# Altium PCB DC721E V1.0.PcbDoc (part 2 of 2)
Units mm, origin at the board's own origin, x right, y up, seen from the top; angles counter-clockwise.
Board outline 110.72 x 218.65 mm, 2 copper layers (Top Layer, Bottom Layer); 126 components, 58 nets, 282 pads, 418 vias.
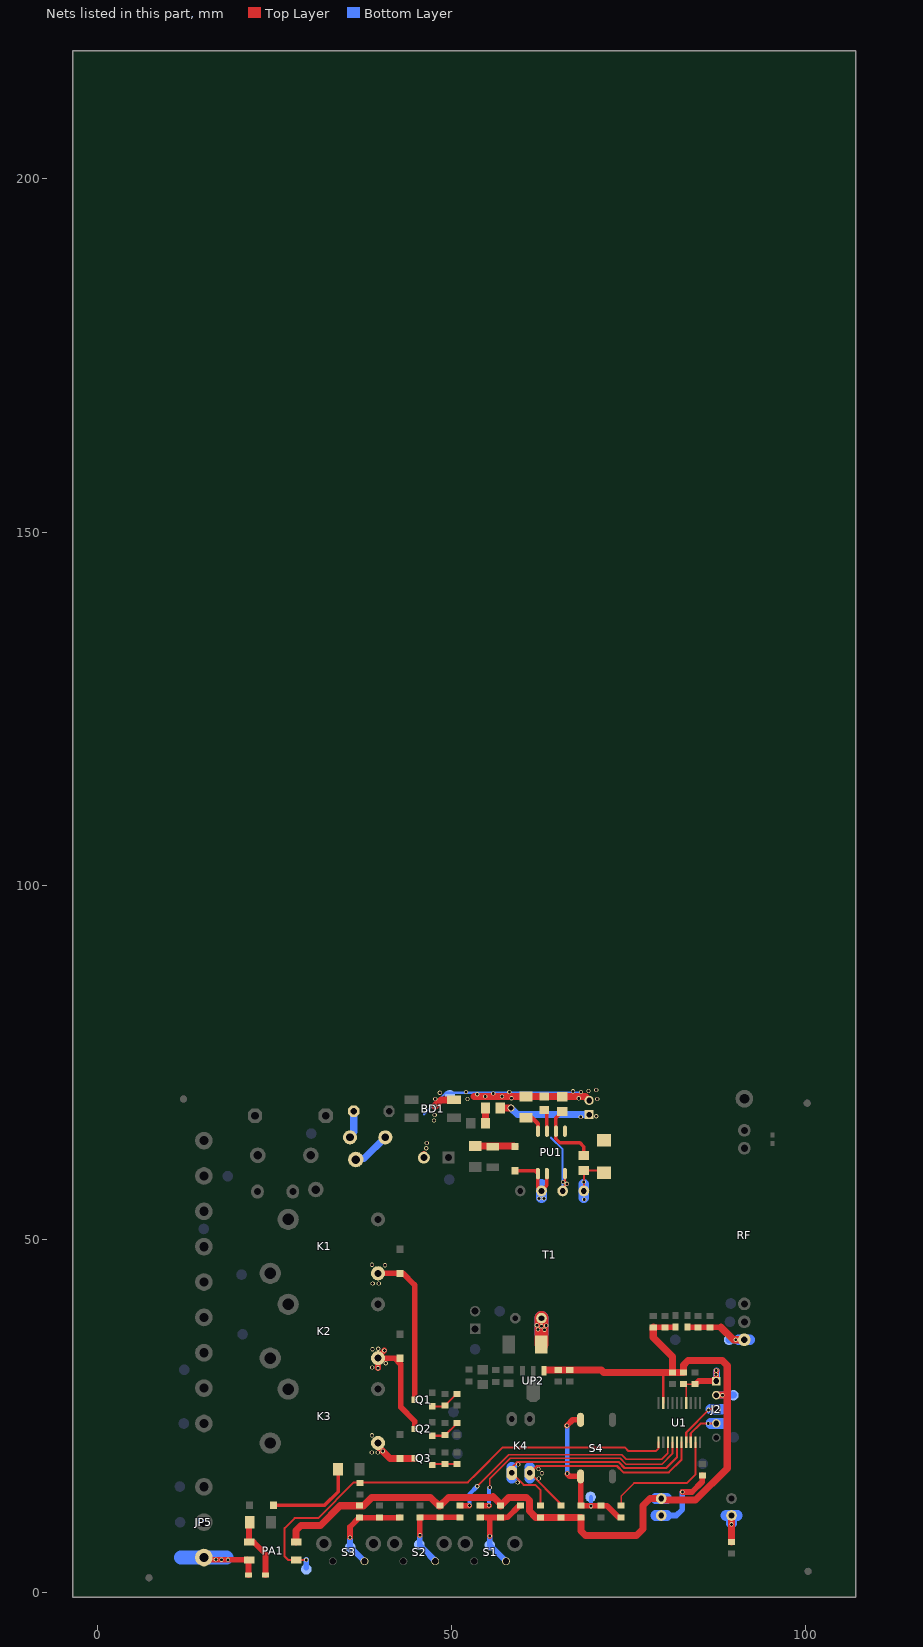
[diagram p2: the nets of this part, all layers, seen from the top]

## Via types
v1: diameter 0.6, hole 0.4, Top Layer to Bottom Layer, tented both sides, 417 vias
v2: diameter 1, hole 0.7, Top Layer to Bottom Layer, tented both sides, 1 vias

## Nets (pads, with @x,y where several pads share a name; then routed paths per layer and width w, separated by ;. In a path a pad name is that pad's centre, name@x,y a point inside that pad or via, vN(x,y) a via of type N, cw(c..) or ccw(c..) an arc to the next point about the centre after c; other vN are vias at no path point) (continued)
NetC10_1: C10.1 R2.2 R3.2 S1.3 UP.1 | length 16.1
  Top Layer w0.8: R3.2@54.077,10.675 R2.2@56.923,10.675 ; 54.938,10.618 55.423,10.618 ; v1(55.423,8.052) 55.423,10.618 ; 57.486,10.618 R2.2@56.923,10.618 ; C10.1@59.781,12.325 59.581,12.325 57.931,10.675 R2.2@56.923,10.675 ; 55.423,10.618 R2.2@56.923,10.618 ; R2.2@56.923,10.618 R2.2@56.923,10.675
  Bottom Layer w0.8: v1(55.423,8.052) UP.1@55.423,6.754 S1.3@57.71,4.467
NetC11_1: C11.1 R4.2 R5.2 S2.3 STOP.1 | length 13.9
  Top Layer w0.8: v1(45.542,8.153) 45.542,10.667 C11.1@45.55,10.675 R4.2@48.385,10.675 R5.2@51.231,10.675
  Bottom Layer w0.8: v1(45.542,8.153) 45.542,6.756 47.71,4.589 S2.3@47.71,4.467 46.939,5.238
NetC12_1: C12.1 DOWN.1 R6.2 R7.2 S3.3 | length 17.6
  Top Layer w0.8: v1(35.662,7.849) 35.662,9.337 R6.2@36.968,10.643 ; R6.2@37,10.675 R6.2@36.968,10.643 ; 37.923,10.618 39.662,10.618 R7.2@42.199,10.618 ; R7.2@42.692,10.675 42.66,10.643 39.858,10.643 R6.2@36.968,10.643
  Bottom Layer w0.8: v1(35.662,7.849) 35.662,6.516 S3.3@37.71,4.467
NetC13_1: C13.1 R8.2 R9.2 S4.2 S4.3 SET.1 | length 23.9
  Top Layer w0.254: v1(66.319,23.647) v1@66.319,23.927 ; v1@66.37,16.815 v1(66.37,16.891) ; S4.3@68.26,16.472 S4.3@68.26,17.031
  Top Layer w0.3: R9.2@73.653,10.675 R9.2@74,10.675
  Top Layer w0.8: v1(66.319,23.647) 67.144,24.472 S4.2@68.26,24.472 ; v1@66.37,16.815 66.713,16.472 S4.3@68.26,16.472 68.308,16.425 R8.2@68.308,12.325 C13.1@71.165,12.325 72.003,12.325 R9.2@73.653,10.675
  Bottom Layer w0.254: v1(66.319,23.647) v1@66.37,23.597 ; SET.1@69.672,13.564 SET.1@69.723,13.513
  Bottom Layer w0.6: v1(66.37,16.891) v1@66.37,23.597 ; v1(69.723,12.268) SET.1@69.723,13.513
NetCP2_2: CP2.2 DP2.2 RP3.1 | length 5.7
  Top Layer w1: RP3.1@53.365,63.197 58.874,63.197 DP2.2@58.979,63.092
NetCP3_1: CP3.1 DP1.2 PU1.1 RP2.1 | length 12.9
  Top Layer w1: RP2.1@56.905,68.555 v2(58.395,68.555)
  Bottom Layer w1: v2(58.395,68.555) 59.318,67.631 66.345,67.631 CP3.1@69.469,67.631
  other v1: 68.275,67.285 70.485,67.386
NetCP4_1: CP4.1 PU1.3 | length 3.2
  Top Layer w0.5: CP4.1@63.119,68.29 63.5,67.909 PU1.3@63.5,65.281
NetD1_1: D1.1 K1.4 Q1.1 | length 22.1
  Top Layer w0.8: K1.4@39.62,45.19 39.622,45.188 D1.1@42.748,45.188 43.153,45.188 44.8,43.541 Q1.1@44.8,27.33
  other v1: 38.862,43.764 39.726,43.764 40.589,46.33 38.76,46.406
NetD2_1: D2.1 K2.4 Q2.1 | length 16.9
  Top Layer w0.8: K2.4@39.144,33.19 K2.4@39.62,33.19 ; v1(39.624,31.775) 39.62,31.779 K2.4@39.62,33.19 ; v1(40.513,34.29) 39.62,33.397 K2.4@39.62,33.19 ; Q2.1@44.8,23.177 44.8,24.288 42.824,26.264 42.824,32.336 41.97,33.19 K2.4@39.62,33.19
  other v1: 38.811,31.877 40.716,32.461 38.837,34.442 39.649,34.519
NetD3_1: D3.1 K3.4 Q3.1 | length 6
  Top Layer w1: K3.4@39.144,21.19 41.308,19.026 41.986,19.026 44.29,19.026 ; Q3.1@44.798,19.026 Q3.1@44.8,19.025
  other v1: 38.735,19.863 39.573,19.863 40.293,20.041 38.76,22.276
NetD4_2: D4.2 PA1.1 R19.1 | length 8.1
  Top Layer w0.8: R19.1@21.375,9.32 21.375,7.279 PA1.1@21.44,7.214 22.028,7.214 23.704,5.537 D4.2@23.704,2.54
NetD5_1: D5.1 R12.2 | length 13.1
  Top Layer w0.5: D5.1@24.865,12.395 32.055,12.395 33.984,14.324 R12.2@33.984,17.475
NetDP1_1: DP1.1 RP4.2 T1.1 | length 7.8
  Top Layer w0.3: T1.1@68.73,56.837 68.732,56.839 RP4.2@68.732,59.732 71.242,59.732 DP1.1@71.577,59.397
  Bottom Layer w1.5: v1@68.73,55.888 68.73,57.788
  other v1: 68.783,55.626 68.707,58.09
NetDP2_1: DP2.1 PU1.5 PU1.6 T1.3 | length 10.7
  Top Layer w0.5: DP2.1@58.979,59.692 61.819,59.692 PU1.5@62.23,59.281 62.23,57.336 T1.3@62.73,56.837 63.5,57.607 PU1.6@63.5,59.281
  Bottom Layer w1.5: 62.73,55.888 62.73,57.788
  other v1: 62.382,55.753 63.068,55.753
NetDS1_1: DS1.1 T1.6 | length 5.9
  Top Layer w1: DS1.1@62.701,35.128 DS1.1@62.73,35.157
  Top Layer w2: DS1.1@62.73,35.157 T1.6@62.73,38.837
  Bottom Layer w2: 62.73,36.669 T1.6@62.73,38.837
  other v1: 63.17,37.211 62.255,37.236 62.73,37.694 63.398,37.821 62.078,37.846
NetLED1_2: LED1.2 R10.1 | length 11.7
  Top Layer w0.8: v1(82.652,14.275) 84.023,14.275 85.471,15.723 R10.1@85.471,16.599
  Bottom Layer w0.8: LED1.2@79.664,10.941 81.782,10.941 82.652,11.811 v1(82.652,14.275)
  Bottom Layer w1.5: 78.891,10.941 80.451,10.941
NetLED2_2: LED2.2 R11.1 | length 6.4
  Top Layer w0.3: LED2.2@89.586,10.927 LED2.2@89.6,10.941
  Top Layer w1: R11.1@89.586,7.2 LED2.2@89.586,10.927
  Bottom Layer w1.5: 88.827,10.941 LED2.2@89.6,10.941 ; v1@89.6,9.869 LED2.2@89.6,10.941 ; 90.387,10.941 LED2.2@89.6,10.941
  other v1: 89.6,9.692
NetLS1_1: LS1.1 RP8.2 | length 3.9
  Bottom Layer w1: RP8.2@35.651,64.414 35.651,64.643 36.184,65.176 LS1.1@36.184,68.097
NetNTC_2: NTC.2 RP8.1 | length 5.5
  Bottom Layer w0.3: NTC.2@36.483,61.277 NTC.2@36.625,61.419
  Bottom Layer w1: NTC.2@36.625,61.419 37.656,61.419 RP8.1@40.651,64.414
NetPU1_2: PU1.2 RP4.1 RP5.2 | length 9.9
  Top Layer w0.5: RP5.2@65.684,68.063 64.77,67.149 PU1.2@64.77,65.281 64.77,64.211 65.329,63.652 68.174,63.652 68.732,63.094 RP4.1@68.732,61.832
NetPU1_4: PU1.4 RP6.2 | length 3.1
  Top Layer w0.6: RP6.2@60.528,67.182 61.393,67.182 62.23,66.345 PU1.4@62.23,65.281
NetQ1_3: Q1.3 R13.1 R14.1 | length 4.2
  Top Layer w0.3: Q1.3@47.3,26.38 48.973,26.38 50.748,28.155 R13.1@50.8,28.155
NetQ2_3: Q2.3 R15.1 R16.1 | length 4.2
  Top Layer w0.3: Q2.3@47.3,22.227 49.025,22.227 R15.1@50.8,24.002
NetQ3_3: Q3.3 R17.1 R18.1 | length 3.6
  Top Layer w0.3: Q3.3@47.3,18.075 47.425,18.2 R18.1@49.098,18.2 R17.1@50.8,18.2
NetRP1_1: RP1.1 RP2.2 | length 2.2
  Top Layer w0.5: RP2.2@54.805,68.555 RP2.2@54.822,68.537
  Top Layer w1: RP1.1@54.822,66.396 RP2.2@54.822,68.537
NRST: C1.1 J2.1 R1.2 U1.4 | length 10.5
  Top Layer w0.254: U1.4@83.195,26.854 83.195,29.126 R1.2@82.818,29.503 C1.1@84.43,29.503
  Top Layer w0.8: C1.1@84.43,29.503 84.507,29.503 84.963,29.959 J2.1@87.452,29.959 87.452,31.369 v1@87.478,31.394
  Bottom Layer w1: J2.1@87.452,29.959 v1@87.452,31.344
  other v1: 87.427,30.886 87.452,31.445
PGND: BD1.2 CP1.2 CP3.2 CP4.2 PGND.1 PU1.8 RP5.1 RP6.1 T1.2 | length 55.9
  Top Layer w0.3: T1.2@65.73,56.837 66.04,57.147 PU1.8@66.04,59.281
  Top Layer w1: CP1.2@46.104,61.544 CP1.2@46.104,62.004 ; v1(47.65,68.809) 48.545,69.703 BD1.2@50.371,69.703 ; 53.203,70.182 RP6.1@60.528,70.182 68.918,70.182 CP3.2@69.469,69.631
  Bottom Layer w0.3: 46.104,67.643 49.174,70.714 68.386,70.714 CP3.2@69.469,69.631 ; 64.059,64.389 65.73,62.718 T1.2@65.73,56.837
  other v1: 66.319,57.836 65.761,58.09 46.431,62.865 46.507,63.602 47.523,66.802 47.625,67.589 70.612,69.825 47.701,69.85 52.273,69.85 67.996,69.926 58.496,69.952 54.788,70.182 57.15,70.182 53.645,70.51 55.905,70.612 48.362,70.714 52.07,70.841 58.191,70.841 68.326,70.841 67.183,70.917 69.367,70.968 70.485,71.095
S1: K4.1 R21.2 U1.15 | length 35.3
  Top Layer w0.3: K4.1@58.522,16.967 60.208,15.28 61.868,15.28 62.615,14.533 R21.2@62.615,12.325 ; 58.801,17.983 59.319,18.501 73.633,18.501 74.48,17.653 80.391,17.653 81.895,19.157 U1.15@81.895,21.304
  Bottom Layer w1.5: K4.1@58.522,16.194 K4.1@58.522,17.755
  other v1: 59.36,15.621 59.436,18.161
S2: K4.2 R22.1 U1.16 | length 33.5
  Top Layer w0.3: R22.1@65.462,12.325 65.462,12.567 K4.2@61.062,16.967 62.041,17.947 73.403,17.947 74.307,17.043 80.721,17.043 82.545,18.867 U1.16@82.545,21.304
  Bottom Layer w1.5: K4.2@61.062,16.194 K4.2@61.062,17.755
  other v1: 62.357,16.18 62.789,16.916 62.306,17.526
SET: R9.1 U1.19 | length 20.7
  Top Layer w0.254: R9.1@74,12.325 74,13.7 75.819,15.519 80.112,15.519 ; 83.109,15.519 80.112,15.519 ; U1.19@84.495,21.304 84.495,16.728 83.287,15.519 80.112,15.519
SING: D4.1 JP5.1 PA1.2 Sing.1 | length 15.5
  Top Layer w0.3: JP5.1@15,5 JP5.1@15.392,5 ; PA1.2@21.113,5 PA1.2@21.304,4.809
  Top Layer w0.8: JP5.1@15.392,5 15.719,4.674 PA1.2@21.44,4.674 21.304,4.538 D4.1@21.304,2.54
  Bottom Layer w2: Sing.1@11.764,5 JP5.1@15,5 18.216,5
  other v1: 18.39,4.674 17.501,4.699 16.688,4.724
SING-IO: PA1.3 R20.1 Sing-IO.1 U1.11 | length 67.8
  Top Layer w0.3: v1(29.464,4.674) PA1.3@28.04,4.674 26.899,4.674 26.416,5.156 26.416,9.144 27.838,10.566 31.151,10.566 36.205,15.621 52.299,15.621 53.619,16.942 ; 54,17.323 53.619,16.942 ; U1.11@79.295,21.304 79.295,20.443 78.892,20.041 75.032,20.041 74.493,20.579 57.256,20.579 53.619,16.942
  Bottom Layer w0.8: Sing-IO.1@29.464,3.556 v1(29.464,4.674)
STOP: R5.1 U1.13 | length 35.5
  Top Layer w0.254: v1@52.533,12.325 v1(52.553,12.344) ; v1(53.653,15.078) 58.115,19.54 74.063,19.54 74.698,18.905 79.756,18.905 80.595,19.744 U1.13@80.595,21.304
  Top Layer w0.8: R5.1@51.231,12.325 v1@52.533,12.325
  Bottom Layer w0.254: v1@53.653,15.02 v1(53.653,15.078)
  Bottom Layer w0.6: v1(52.553,12.344) 52.553,13.977 v1(53.653,15.078)
SWCLK: J2.4 U1.18 | length 7
  Top Layer w0.3: U1.18@83.845,21.304 83.845,22.555 85.249,23.959 J2.4@87.452,23.959
  Bottom Layer w1.5: 86.665,23.959 88.225,23.959
  other v1: 86.309,23.952
SWDIO: J2.3 U1.17 | length 8.6
  Top Layer w0.3: U1.17@83.195,21.304 83.195,22.688 86.466,25.959 J2.3@87.452,25.959
  Bottom Layer w1.5: 86.665,25.959 88.225,25.959
  other v1: 86.36,25.883
UP: R3.1 U1.14 | length 34.7
  Top Layer w0.254: v1@55.302,12.325 v1(55.321,12.344) ; v1(55.423,14.91) 55.423,16.129 58.326,19.032 73.853,19.032 74.687,18.197 79.767,18.197 81.245,19.675 U1.14@81.245,21.304
  Top Layer w0.8: R3.1@54.077,12.325 v1@55.302,12.325
  Bottom Layer w0.6: v1(55.321,12.344) 55.321,14.808 v1(55.423,14.91)
VCC: C2.2 CF9.1 CF10.1 CP7.1 CP8.1 J2.2 LED1.1 PA1.4 R1.1 R2.1 R4.1 R6.1 R8.1 R21.1 R22.2 RB3.1 U1.9 UP2.3 VCC.1 | length 144.6
  Top Layer w0.3: UP2.3@63.07,31.416 63.162,31.508 63.525,31.508 ; 79.945,29.947 U1.9@79.945,26.854 79.945,30.91 80.188,31.153
  Top Layer w0.8: CF10.1@78.574,37.567 RB3.1@81.382,37.567
  Top Layer w1: PA1.4@28.04,7.214 28.04,8.839 28.751,9.55 31.471,9.55 34.245,12.325 R6.1@37,12.325 37.555,12.325 38.734,13.504 47.058,13.504 48.237,12.325 R4.1@48.385,12.325 49.564,13.504 55.77,13.504 55.88,13.614 56.923,12.571 R2.1@56.923,12.325 58.102,13.504 60.613,13.504 61.036,13.081 61.036,11.557 61.918,10.675 R21.1@62.615,10.675 R22.2@65.462,10.675 R8.1@68.308,10.675 68.308,8.739 68.944,8.103 76.175,8.103 77.089,9.017 77.089,12.37 78.06,13.341 LED1.1@79.664,13.341 79.781,13.341 80.002,13.121 84.52,13.121 89.002,17.602 89.002,24.917 ; 63.525,31.508 CP8.1@65.1,31.508 CP7.1@66.726,31.508 71.183,31.508 71.539,31.153 80.188,31.153 C2.2@81.229,31.153 ; CF10.1@78.574,37.567 CF10.1@78.537,37.529 78.537,36.119 81.229,33.426 C2.2@81.229,31.153 ; 82.818,32.119 R1.1@82.818,31.153 ; J2.2@87.452,27.959 88.957,27.959 89.002,27.915 ; 89.002,24.003 89.002,24.917 ; C2.2@81.229,31.153 R1.1@82.818,31.153 ; R1.1@82.818,31.153 82.818,32.196 83.464,32.842 88.29,32.842 89.002,32.131 89.002,27.915 ; 89.002,24.917 89.002,27.915
  Bottom Layer w0.3: VCC.1@89.846,27.959 VCC.1@89.865,27.94
  Bottom Layer w1: J2.2@87.452,27.959 VCC.1@89.846,27.959
  Bottom Layer w1.5: 78.891,13.341 80.451,13.341
  other v1: 88.316,27.94
VCC_ANT: CF7.1 CF8.1 RB3.2 RF.1 VCC_ANT.1 | length 12.2
  Top Layer w0.8: RB3.2@83.693,37.567 88.087,37.567
  Top Layer w1: 88.087,37.567 89.865,35.789 RF.1@91.415,35.789
  Bottom Layer w1: VCC_ANT.1@89.256,35.789 RF.1@91.415,35.789
  Bottom Layer w1.5: RF.1@90.627,35.789 RF.1@92.188,35.789
  other v1: 90.195,35.789
pads on no net: MAKE1. MAKE2. MAKE3. MAKE4. U1.3 U1.8 U1.10
copper on no net:
  other v1: 0,0

## Polygon pours and split planes (outlines as drawn)
GND on Top Layer "BottomLayer-No Net" (solid, remove dead copper, pour order 1040): 103.835,42.342 103.784,42.291 74.524,42.291 73.787,42.291 72.822,41.326 72.492,40.996 72.492,37.16 72.492,34.036 71.526,33.071 70.51,32.055 62.84,32.055 43.84,32.055 42.672,30.886 41.3,29.515 41.3,20.142 33.35,12.192 32.563,11.405 13.995,11.405 11.43,11.405 10.744,10.719 9.855,9.83 9.855,0.025 102.514,0.025 103.886,1.397
S1 on Top Layer "BottomLayer-No Net" (solid, remove dead copper, pour order 1038): 61.29,18.644 58.877,18.644 58.471,18.644 58.014,18.186 57.734,17.907 57.734,17.221 57.734,15.824 57.963,15.596 58.42,15.138 61.214,15.138 60.63,15.138 60.147,15.621 59.842,15.926 59.842,17.526 59.842,17.805 60.401,18.364 60.477,18.44 61.366,18.44
S2 on Top Layer "BottomLayer-No Net" (solid, remove dead copper, pour order 1036): 63.068,18.11 60.731,18.11 60.579,18.11 60.477,18.009 60.3,17.831 60.3,17.17 60.3,16.129 60.528,15.9 61.493,15.9 61.925,15.9 62.281,15.545 64.795,13.03 64.795,11.989 64.795,11.963 64.872,11.887 65.126,11.887 65.938,11.887 65.964,11.913 65.964,12.268 65.964,12.751 65.634,13.081 63.449,15.265 63.449,17.272 63.449,17.628 63.729,17.907
12V/250MA on Top Layer "BottomLayer-No Net" (solid, remove dead copper, pour order 1034): 43.231,22.123 43.231,22.758 43.231,23.114 42.621,23.724 41.707,24.638 41.707,30.074 41.707,30.658 41.453,30.912 41.402,30.963 40.716,30.963 40.183,30.963 38.76,29.54 38.684,29.464 38.684,25.425 38.684,24.809 37.464,23.588 37.497,23.622 40.183,23.622 40.234,23.622 41.859,21.996 42.037,21.819 43.053,21.819 43.18,21.819 43.231,21.869
12V/250MA on Top Layer "BottomLayer-No Net" (solid, remove dead copper, pour order 1032): 43.256,36.093 43.256,37.922 43.256,41.275 42.469,42.062 39.37,42.062 39.065,42.062 38.608,41.605 38.481,41.478 38.481,40.945 38.481,39.827 42.215,36.093
12V/250MA on Top Layer "BottomLayer-No Net" (solid, remove dead copper, pour order 1030): 39.167,53.873 40.183,53.873 40.538,53.873 42.266,52.146 43.256,51.156 43.256,48.133 42.469,48.133 38.583,52.019 38.583,53.264 38.583,53.289 39.167,53.873
NetD3_1 on Top Layer "BottomLayer-No Net" (solid, remove dead copper, pour order 1028): 45.263,19.558 43.129,19.558 40.234,22.454 40.005,22.682 38.811,22.682 38.583,22.682 38.405,22.504 38.379,22.479 38.379,21.869 38.379,19.533 38.633,19.279 39.421,18.491 44.831,18.491 45.263,18.491 45.339,18.567 45.339,18.923 45.339,19.482 45.263,19.558
NetD2_1 on Top Layer "BottomLayer-No Net" (solid, remove dead copper, pour order 1026): 43.231,26.797 43.231,28.905 43.231,34.061 42.748,34.544 42.393,34.9 39.091,34.9 38.557,34.9 38.405,34.747 38.405,33.426 38.405,31.623 38.633,31.394 38.735,31.293 39.37,31.293 42.088,31.293 42.393,30.988 42.418,30.963 42.418,30.353 42.418,27.102 42.824,26.695
NetD1_1 on Top Layer "BottomLayer-No Net" (solid, remove dead copper, pour order 1025): 38.456,46.812 42.139,46.812 44.196,44.755 45.212,43.739 45.212,41.554 45.187,41.554 43.434,43.307 39.091,43.307 38.659,43.307 38.456,43.51 38.43,43.536 38.43,44.196 38.43,46.787 38.456,46.812
NetPU1_4 on Top Layer "BottomLayer-No Net" (solid, remove dead copper, pour order 1023): 61.925,64.745 61.925,65.608 61.925,65.989 61.62,66.294 61.443,66.472 60.96,66.472 59.665,66.472 59.639,66.497 59.639,67.386 59.639,67.64 59.868,67.869 59.893,67.894 60.884,67.894 61.417,67.894 61.671,67.64 62.535,66.777 62.535,64.897
NetCP3_1 on Top Layer "BottomLayer-No Net" (solid, remove dead copper, pour order 1021): 70.51,63.475 70.485,63.5 70.485,66.615 70.095,67.005 68.732,67.005 66.523,64.795 66.192,64.465 65.913,64.465 65.71,64.668 65.71,64.795 65.71,65.964 65.888,66.142 65.913,66.167 66.7,66.167 68.809,68.275 69.926,68.275 70.129,68.275 70.968,67.437 72.593,65.811 72.593,64.084 72.593,63.119 72.542,63.068 70.637,63.068 70.485,63.221
Net310V_1 on Top Layer "BottomLayer-No Net" (solid, remove dead copper, pour order 1020): 53.365,67.132 52.68,67.818 50.876,67.818 49.378,67.818 49.352,67.793 49.352,67.742 49.352,66.624 49.606,66.37 49.86,66.116 49.86,65.202 49.86,63.475 48.743,62.357 48.616,62.23 48.616,60.681 48.616,60.655 49.174,60.096 49.809,59.461 52.807,59.461 54.534,59.461 57.81,56.185 58.496,55.499 59.614,55.499 60.249,55.499 60.35,55.601 60.452,55.702 60.452,57.734 60.452,57.963 60.249,58.166 60.223,58.191 59.207,58.191 57.785,58.191 56.845,59.131 56.718,59.258 56.718,59.944 56.718,60.808 56.566,60.96 53.492,60.96 51.46,60.96 51.029,61.392 50.851,61.57 50.851,63.856 50.851,65.126 51.079,65.354 51.384,65.659 53.365,65.659
NetDP2_1 on Top Layer "BottomLayer-No Net" (solid, remove dead copper, pour order 1022): 58.496,60.3 62.23,60.3 62.382,60.147 62.535,59.995 62.535,57.887 62.535,57.785 62.636,57.683 62.713,57.607 62.89,57.607 62.992,57.607 63.144,57.76 63.195,57.81 63.195,58.776 63.195,60.071 63.297,60.173 63.322,60.198 63.551,60.198 63.652,60.198 63.779,60.071 63.805,60.046 63.805,59.461 63.805,57.556 63.551,57.302 63.475,57.226 63.475,56.515 63.475,55.575 63.297,55.397 63.195,55.296 62.433,55.296 62.306,55.296 62.001,55.601 61.951,55.651 61.951,57.81 61.951,58.674 61.646,58.979 61.443,59.182 59.08,59.182 58.445,59.182 58.395,59.233 58.344,59.284 58.344,59.538 58.344,60.147 58.496,60.3
NetDP1_1 on Top Layer "BottomLayer-No Net" (solid, remove dead copper, pour order 1024): 72.593,60.401 68.047,60.401 67.996,60.401 67.894,60.3 67.894,59.411 67.894,55.677 68.072,55.499 68.402,55.169 69.291,55.169 71.933,55.169 72.568,55.804 72.669,55.905 72.669,59.36 72.669,60.325 72.593,60.401
ACN on Top Layer "BottomLayer-No Net" (solid, remove dead copper, pour order 1027): 45.364,69.088 43.409,69.088 43.358,69.088 43.104,69.342 42.037,70.409 39.776,70.409 25.222,70.409 24.257,69.444 23.647,68.834 23.647,67.742 23.647,66.878 23.292,66.523 23.012,66.243 22.403,66.243 21.666,66.243 21.336,66.573 21.031,66.878 21.031,67.488 21.031,70.155 21.463,70.587 22.301,71.425 31.979,71.425 45.187,71.425 45.288,71.323 45.364,71.247 45.364,70.409
NetBD1_3 on Top Layer "BottomLayer-No Net" (solid, remove dead copper, pour order 1029): 45.339,67.793 43.358,67.793 42.697,67.793 41.732,68.758 41.605,68.885 40.437,68.885 40.132,68.58 40.056,68.504 40.056,68.123 40.056,67.97 41.097,66.929 41.427,66.599 45.364,66.599
PGND on Top Layer "BottomLayer-No Net" (solid, remove dead copper, pour order 1031): 66.624,60.096 66.624,56.21 66.396,55.982 66.37,55.956 65.659,55.956 65.38,55.956 65.176,56.159 64.973,56.363 64.973,56.845 64.973,57.175 65.354,57.556 65.456,57.658 65.456,59.284 65.456,60.046 65.608,60.198 65.684,60.274 66.218,60.274 66.446,60.274 66.624,60.096
PGND on Top Layer "BottomLayer-No Net" (solid, remove dead copper, pour order 1033): 71.247,71.247 71.247,69.621 71.247,69.367 70.968,69.088 70.866,68.986 69.088,68.986 68.351,68.986 67.97,69.367 67.843,69.494 59.766,69.494 59.538,69.494 59.385,69.647 59.36,69.672 58.547,69.672 53.442,69.672 52.984,69.215 52.883,69.113 50.343,69.113 48.768,69.113 48.209,68.555 48.133,68.478 48.133,67.64 48.133,65.176 47.65,64.694 46.965,64.008 46.965,61.417 46.965,60.833 46.66,60.528 46.457,60.325 45.644,60.325 45.212,60.325 45.06,60.477 44.983,60.554 44.983,62.027 44.983,63.754 46.126,64.897 47.142,65.913 47.142,67.996 47.142,70.637 47.625,71.12 47.955,71.45 51.13,71.45 71.044,71.45 71.247,71.247
GND on Bottom Layer "BottomLayer-No Net" (solid, remove dead copper, pour order 1054): 86.512,42.393 44.399,42.393 43.561,41.554 43.231,41.224 43.231,37.313 43.231,29.159 38.786,24.714 38.303,24.232 38.303,19.279 38.303,18.898 32.918,13.513 30.912,11.506 13.03,11.506 11.227,11.506 10.541,10.82 10.414,10.693 10.058,10.338 10.058,0.051 102.591,0.051 103.861,1.321 103.962,1.422 103.962,16.891 103.962,40.538 103.657,40.843 102.108,42.393 86.716,42.393
S1 on Bottom Layer "BottomLayer-No Net" (solid, remove dead copper, pour order 1052): 57.785,16.789 57.785,18.11 58.115,18.44 58.293,18.618 59.182,18.618 59.639,18.618 59.766,18.491 59.893,18.364 59.893,17.729 59.893,15.392 59.715,15.215 59.639,15.138 58.953,15.138 58.42,15.138 58.039,15.519 57.785,15.773 57.785,16.358
S2 on Bottom Layer "BottomLayer-No Net" (solid, remove dead copper, pour order 1050): 61.011,18.517 62.357,18.517 62.967,18.517 63.195,18.288 63.348,18.136 63.348,17.602 63.348,16.205 63.144,16.002 62.586,15.443 60.935,15.443 60.731,15.443 60.477,15.697 60.325,15.85 60.325,16.434 60.325,18.186 60.655,18.517
NetD3_1 on Bottom Layer "BottomLayer-No Net" (solid, remove dead copper, pour order 1048): 38.71,23.752 40.31,23.752 40.691,23.752 40.97,23.473 41.123,23.32 41.123,22.101 41.123,20.348 40.767,19.993 40.056,19.282 38.71,19.282 38.633,19.282 38.379,19.536 38.379,20.094 38.379,23.422 38.71,23.752
NetD2_1 on Bottom Layer "BottomLayer-No Net" (solid, remove dead copper, pour order 1046): 38.71,35.752 40.31,35.752 40.691,35.752 40.97,35.473 41.123,35.32 41.123,34.101 41.123,32.348 40.767,31.993 40.056,31.282 38.71,31.282 38.633,31.282 38.379,31.536 38.379,32.094 38.379,35.422 38.71,35.752
NetD1_1 on Bottom Layer "BottomLayer-No Net" (solid, remove dead copper, pour order 1044): 38.71,47.752 40.31,47.752 40.691,47.752 40.97,47.473 41.123,47.32 41.123,46.101 41.123,44.348 40.767,43.993 40.056,43.282 38.71,43.282 38.633,43.282 38.379,43.536 38.379,44.094 38.379,47.422 38.71,47.752
12V/250MA on Bottom Layer "BottomLayer-No Net" (solid, remove dead copper, pour order 1042): 38.583,53.365 38.583,51.892 41.046,49.428 41.478,48.997 41.478,44.348 38.684,41.554 38.583,41.453 38.583,40.335 38.583,40.132 40.64,38.075 41.453,37.262 41.453,33.579 41.453,32.283 38.659,29.489 38.608,29.439 38.608,27.026 38.608,26.949 38.786,26.772 38.887,26.67 39.497,26.67 39.954,26.67 41.351,28.067 42.443,29.159 42.443,31.064 42.443,51.765 40.411,53.797 40.335,53.873 39.243,53.873 39.091,53.873 38.583,53.365
ACN on Bottom Layer "BottomLayer-No Net" (solid, remove dead copper, pour order 1035): 24.232,69.215 24.232,64.694 24.232,61.265 23.647,60.681 22.149,60.681 21.184,61.646 20.218,62.611 14.783,62.611 11.887,62.611 10.465,61.189 10.033,60.757 10.033,59.36 10.033,36.297 10.719,35.611 11.1,35.23 14.961,35.23 15.519,35.23 16.129,34.62 16.256,34.493 16.256,33.401 16.256,28.296 15.799,27.838 15.646,27.686 14.63,27.686 7.849,27.686 6.858,28.677 5.74,29.794 5.74,32.766 5.74,68.072 6.604,68.936 8.128,70.46 22.987,70.46 24.232,69.215
ACL on Bottom Layer "BottomLayer-No Net" (solid, remove dead copper, pour order 1037): 13.843,60.173 18.542,60.173 19.329,59.385 20.98,57.734 22.708,57.734 23.165,57.734 23.444,57.455 23.52,57.379 23.52,55.677 23.114,55.27 22.835,54.991 21.844,54.991 19.939,54.991 18.466,56.464 17.272,57.658 14.63,57.658 13.462,57.658 13.132,57.988 13.03,58.09 13.03,58.776 13.03,59.741 13.462,60.173
M-UP on Bottom Layer "BottomLayer-No Net" (solid, remove dead copper, pour order 1039): 24.917,46.863 21.006,46.863 19.558,46.863 19.05,46.355 17.958,45.263 13.894,45.263 13.614,44.983 13.462,44.831 13.462,44.475 13.462,42.951 13.691,42.723 13.767,42.647 15.011,42.647 24.079,42.647 25.73,44.298 25.908,44.475 25.908,45.847 25.908,45.872 24.917,46.863
M-DN on Bottom Layer "BottomLayer-No Net" (solid, remove dead copper, pour order 1041): 14.021,40.208 17.551,40.208 19.507,40.208 25.476,34.239 25.857,33.858 25.857,32.512 25.857,32.41 25.298,31.852 25.146,31.699 23.724,31.699 20.066,35.357 17.729,37.694 14.681,37.694 13.792,37.694 13.513,37.973 13.487,37.998 13.487,38.633 13.487,39.954 13.741,40.208
L on Bottom Layer "BottomLayer-No Net" (solid, remove dead copper, pour order 1043): 33.223,68.402 33.223,66.726 32.156,65.659 31.902,65.405 31.902,56.49 30.505,55.093 30.505,44.196 30.505,28.956 29.261,27.711 28.219,26.67 26.695,26.67 26.213,26.67 25.171,27.711 25.07,27.813 25.07,28.829 25.07,29.159 26.416,30.505 27.559,31.648 27.559,35.331 27.559,37.694 26.086,39.167 25.4,39.853 25.4,40.818 25.4,41.478 26.568,42.647 27.584,43.663 27.584,47.066 27.584,49.784 25.654,51.714 25.375,51.994 25.375,53.289 25.375,53.848 25.908,54.381 26.34,54.813 26.34,56.871 26.34,57.48 28.016,59.157 28.981,60.122 28.981,63.271 28.981,68.758 29.362,69.139 29.718,69.494 31.699,69.494 32.664,69.494 33.223,68.936
LIGHT on Bottom Layer "BottomLayer-No Net" (solid, remove dead copper, pour order 1045): 11.278,25.197 23.419,25.197 23.749,25.197 25.933,23.012 26.289,22.657 26.289,21.996 26.289,20.193 25.908,19.812 25.654,19.558 23.952,19.558 22.784,19.558 21.438,20.904 19.609,22.733 14.757,22.733 11.328,22.733 10.922,23.139 10.922,24.206 10.922,24.841 11.278,25.197
NetLS1_1 on Bottom Layer "BottomLayer-No Net" (solid, remove dead copper, pour order 1047): 36.982,68.859 36.982,67.462 36.982,64.186 36.322,63.525 36.22,63.424 35.331,63.424 35.179,63.424 34.823,63.779 34.646,63.957 34.646,64.465 34.646,65.202 35.103,65.659 35.306,65.862 35.306,68.631 35.306,69.52 35.56,69.774 35.662,69.875 36.424,69.875 36.728,69.875 36.982,69.621
NetNTC_2 on Bottom Layer "BottomLayer-No Net" (solid, remove dead copper, pour order 1049): 41.427,65.405 40.234,65.405 39.294,64.465 37.211,62.382 35.89,62.382 35.712,62.382 35.179,61.849 35.128,61.798 35.128,61.214 35.128,60.63 35.357,60.401 35.611,60.147 36.398,60.147 37.948,60.147 41.631,63.83 41.707,63.906 41.707,65.024 41.707,65.126 41.427,65.405
Net310V_1 on Bottom Layer "BottomLayer-No Net" (solid, remove dead copper, pour order 1051): 48.666,62.662 50.419,62.662 50.597,62.662 50.775,62.484 50.927,62.332 50.927,60.604 50.927,58.166 50.673,57.912 49.505,57.912 48.565,57.912 48.362,58.115 48.362,62.357 48.666,62.662
PGND on Bottom Layer "BottomLayer-No Net" (solid, remove dead copper, pour order 1053): 46.99,60.782 46.99,62.484 46.99,62.992 47.168,63.17 48.057,64.059 49.2,64.059 63.246,64.059 64.262,63.043 64.948,62.357 64.948,57.201 64.948,56.363 65.354,55.956 65.43,55.88 66.345,55.88 66.472,55.88 66.675,56.083 66.751,56.159 66.751,57.328 66.751,64.364 65.405,65.71 65.126,65.989 57.099,65.989 48.339,65.989 46.104,63.754 45.923,63.574 45.923,60.528 46.101,60.35 46.152,60.3 46.482,60.3 46.507,60.3 46.99,60.782
PGND on Bottom Layer "BottomLayer-No Net" (solid, remove dead copper, pour order 1055): 69.774,68.961 63.094,68.961 59.715,68.961 59.258,69.418 58.166,69.418 50.98,69.418 46.104,64.541 45.466,63.904 45.466,63.119 45.466,62.001 45.644,61.824 45.923,61.544 46.253,61.214 46.253,60.808 46.253,60.401 46.152,60.3 45.237,60.3 45.161,60.3 45.009,60.452 44.958,60.503 44.958,60.731 44.958,70.815 45.415,71.272 45.644,71.501 65.507,71.501 70.841,71.501 71.069,71.272 71.171,71.171 71.171,70.358 71.171,69.367 70.942,69.139 70.764,68.961 69.774,68.961
NetCP3_1 on Bottom Layer "BottomLayer-No Net" (solid, remove dead copper, pour order 1056): 70.282,68.402 59.436,68.402 58.953,68.885 58.725,69.113 58.166,69.113 58.014,69.113 57.937,69.037 57.81,68.91 57.81,68.656 57.81,67.818 58.699,66.929 68.91,66.929 70.663,66.929 70.739,67.005 70.764,67.031 70.764,67.488 70.764,68.148 70.51,68.402

## Keep-outs
Keep-Out Layer:
  circle w0.1: c106.997,211.032 r2
  circle w0.254: c107,211.017 r2
  circle w0.1: c107.011,211.031 r2
  circle w0.1: c107.011,5.004 r2
  circle w0.254: c107,5.017 r2
  circle w0.1: c68,180.017 r1.6
  circle w0.1: c68,108.017 r1.6
  circle w0.1: c68,36.017 r1.6
  lines w0.254: 104,0.017 104,216.017 108,216.017 cw(c108,212.017) 112,212.017 112,4.017 ; 104,4 104,0 108,0 ccw(c108,4) 112,4 ; 2,72.017 ccw(c2,70.017) 0,70.017 0,2.017 ccw(c2,2.017) 2,0.017 25.46,0.017 25.46,2.017 65.46,2.017 65.46,0.017 102,0.017 ccw(c102,2.017) 104,2.017 104,31.917 99.5,31.917 cw(c99.5,35.917) 99.5,39.917 104,39.917 104,70.017 ccw(c102,70.017) 102,72.017 ; 2,72.017 cw(c2,74.017) 0,74.017 0,142.017 cw(c2,142.017) 2,144.017 ; 2,72.017 102,72.017 ; 2,72.017 25.46,72.017 25.46,74.017 65.46,74.017 65.46,72.017 102,72.017 ; 2,144.017 cw(c2,146.017) 0,146.017 0,214.017 cw(c2,214.017) 2,216.017 102,216.017 cw(c102,214.017) 104,214.017 104,183.917 99.5,183.917 ccw(c99.5,179.917) 99.5,175.917 104,175.917 104,146.017 cw(c102,146.017) 102,144.017 ; 2,144.017 102,144.017 ; 2,144.017 25.46,144.017 25.46,146.017 65.46,146.017 65.46,144.017 102,144.017 ; 102,72.017 ccw(c102,74.017) 104,74.017 104,103.917 99.5,103.917 cw(c99.5,107.917) 99.5,111.917 104,111.917 104,142.017 ccw(c102,142.017) 102,144.017

## Silkscreen, mask and mechanical layers (free items; w line width, h text height)
Top Overlay:
  circle w0.2: c68,36.017 r3
  lines w0.254: 0.076,2.506 11.455,2.506 ; 0.076,17.494 11.455,17.494 ; 0.076,21.458 11.455,21.458 ; 0.076,31.458 11.455,31.458 ; 0.076,51.458 11.455,51.458 ; 0.076,66.446 11.455,66.446
  text "N" at 5.639,64.694 h2 r270
  text "AC230V-IN" at 1.88,62.916 h1 r270
  text "L" at 5.461,59.893 h2 r270
  text "E" at 5.486,55.093 h2 r270
  text "E" at 5.461,50.089 h2 r270
  text "DC721E V1.0" at 79.781,47.727 h2 r90
  text "2024.7.16" at 83.109,47.676 h2 r90
  text "AC230V-MOTO" at 1.753,45.974 h1 r270
  text "U" at 5.69,44.806 h2 r270
  text "D" at 5.512,40.107 h2 r270
  text "N" at 5.359,35.027 h2 r270
  text "N" at 5.232,29.947 h2 r270
  text "Light" at 1.397,28.956 h1 r270
  text "L" at 5.105,24.892 h2 r270
  text "12V" at 5.004,13.945 h2
  text "CDJ10-I18BN" at 1.448,13.919 h1 r270
  text "GND" at 5.004,8.966 h2
  text "SING" at 4.293,3.962 h2
Bottom Solder:
  lines w0.5: 6.35,33.23 9.347,30.233 ; 6.35,34.23 9.347,31.233 ; 6.35,35.23 9.347,32.233 ; 6.35,36.23 9.347,33.233 ; 6.35,37.23 9.347,34.233 ; 6.35,38.23 9.347,35.233 ; 6.35,39.23 9.347,36.233 ; 6.35,40.23 9.347,37.233 ; 6.35,41.23 9.347,38.233 ; 6.35,42.23 9.347,39.233 ; 6.35,43.23 9.347,40.233 ; 6.35,44.23 9.347,41.233 ; 6.35,45.23 9.347,42.233 ; 6.35,46.23 9.347,43.233 ; 6.35,47.23 9.347,44.233 ; 6.35,48.23 9.347,45.233 ; 6.35,49.23 9.347,46.233 ; 6.35,50.23 9.347,47.233 ; 6.35,51.23 9.347,48.233 ; 6.35,52.23 9.347,49.233 ; 6.35,53.23 9.347,50.233 ; 6.35,54.23 9.347,51.233 ; 6.35,55.23 9.347,52.233 ; 6.35,56.23 9.347,53.233 ; 6.35,57.23 9.347,54.233 ; 6.35,58.23 9.347,55.233 ; 6.35,59.23 9.347,56.233 ; 6.35,60.23 9.347,57.233 ; 6.35,61.23 9.347,58.233 ; 6.35,62.23 9.347,59.233 ; 6.35,63.23 9.347,60.233 ; 6.35,64.23 9.347,61.233 ; 6.35,65.23 9.347,62.233 ; 6.35,66.23 9.347,63.233 ; 6.35,67.23 9.347,64.233 ; 6.756,67.827 9.754,64.83 ; 7.214,68.539 10.211,65.541 ; 7.696,69.123 10.693,66.126 ; 9.576,68.64 12.573,65.643 ; 10.744,68.92 13.741,65.922 ; 12.527,68.331 14.91,65.948 ; 15.9,66.583 18.898,63.586 ; 16.434,24.714 21.082,24.714 23.114,22.682 ; 16.434,44.679 18.44,44.679 20.066,46.304 22.962,46.304 ; 16.459,38.125 18.186,38.125 22.504,33.807 ; 16.459,38.964 18.694,38.964 23.012,34.646 ; 16.459,59.741 17.374,59.741 ; 16.485,39.7 19.228,39.7 23.901,35.027 ; 16.51,23.952 20.447,23.952 22.555,21.844 ; 16.535,23.216 19.939,23.216 22.327,20.828 ; 16.561,58.242 17.501,58.242 18.593,57.15 20.117,55.626 20.345,55.397 21.666,55.397 ; 16.586,43.663 18.847,43.663 20.345,45.161 22.758,45.161 ; 16.586,59.131 16.612,59.106 17.221,59.106 ; 17.221,66.761 20.218,63.763 ; 18.847,66.684 21.844,63.687 ; 19.202,57.683 20.726,56.159 21.336,56.159 ; 19.609,58.318 21.133,56.794 ; 19.939,67.065 22.936,64.068 ; 20.65,44.018 23.038,44.018 ; 22.936,24.638 22.962,24.638 24.257,23.343 ; 27.915,30.378 29.261,29.032 ; 27.915,31.378 29.972,29.32 ; 27.915,32.378 29.972,30.32 ; 27.915,33.378 29.972,31.32 ; 27.915,34.378 29.972,32.32 ; 27.915,35.378 29.972,33.32 ; 27.915,36.378 29.972,34.32 ; 27.915,37.378 29.972,35.32 ; 27.915,38.378 29.972,36.32 ; 27.915,39.378 29.972,37.32 ; 27.915,40.378 29.972,38.32 ; 27.915,41.378 29.972,39.32 ; 27.915,42.378 29.972,40.32 ; 27.915,43.378 29.972,41.32 ; 27.915,44.378 29.972,42.32 ; 27.915,45.378 29.972,43.32 ; 27.915,46.378 29.972,44.32 ; 27.915,47.378 29.972,45.32 ; 27.915,48.378 29.972,46.32 ; 27.915,49.378 29.972,47.32 ; 27.915,50.378 29.972,48.32 ; 27.915,51.378 29.972,49.32 ; 27.915,52.378 29.972,50.32 ; 27.915,53.378 29.972,51.32 ; 27.915,54.378 29.972,52.32 ; 27.915,55.378 29.972,53.32 ; 27.915,56.378 29.972,54.32 ; 27.915,57.378 29.972,55.32 ; 27.915,58.378 29.972,56.32
Mechanical 3:
  circle w0.1: c45.46,0.025 r1
  circle w0.1: c35.46,0.017 r1
  circle w0.1: c55.46,0.017 r1
  circle w0.1: c-10.5,28.517 r2.5
  circle w0.1: c-10.5,28.517 r1.1
  circle w0.1: c-10.5,4.017 r1.1
  circle w0.1: c-10.5,4.017 r2.5
  circle w0.1: c-10.5,68.017 r2.5
  circle w0.1: c-10.5,68.017 r1.1
  circle w0.1: c-10.5,43.517 r1.1
  circle w0.1: c-10.5,43.517 r2.5
  circle w0.1: c-4,68.017 r3.6
  circle w0.1: c-4,68.017 r1.6
  circle w0.1: c-4,4.017 r1.6
  circle w0.1: c-4,4.017 r3.6
  circle w0.1: c99.5,36.017 r3.6
  circle w0.1: c99.5,36.017 r1.6
  circle w0.1: c68,36.017 r1.25
  circle w0.1: c68,36.017 r2.5
  lines w0.1: -17.73,1.787 ccw(c-15.73,1.787) -15.73,-0.213 ; -17.73,70.247 cw(c-15.73,70.247) -15.73,72.247 ; 102.73,-0.213 ccw(c102.73,1.787) 104.73,1.787 ; 102.73,72.247 cw(c102.73,70.247) 104.73,70.247
  lines w0.127: -17.73,1.787 -17.73,70.247 ; -15.73,72.247 102.73,72.247 ; -15.63,-0.213 102.73,-0.213 ; 29.5,-0.156 29.5,0.017 61.5,0.017 61.5,-0.16 ; 104.73,1.787 104.73,70.247 ; 104.73,8.517 102.73,8.517 102.73,10.017 104.73,10.017 ; 104.73,62.017 102.73,62.017 102.73,63.517 104.73,63.517 ; 4.17,11.017 4.17,16.017 5.7,16.017 5.7,11.017 4.17,11.017 ; 4.17,56.017 5.7,56.017 5.7,61.017 4.17,61.017 4.17,56.017
Drill Drawing:
  text ".Legend" at 112.141,0.398 h0.8

## Text inside footprints (layer, text, board x,y; h text height)
BD1: Top Overlay "+" at 50.622,66.294 h0.7 r180; Top Overlay "-" at 49.86,71.425 h0.7 r270; Top Overlay "-" at 47.498,70.053 h0.7 r270; Top Overlay "+" at 48.387,67.691 h0.7 r180; Top Overlay "s" at 47.066,69.901 h0.7 r180; Top Overlay "s" at 47.092,67.64 h0.7 r180
J2: Top Overlay "1" at 88.748,30.267 h0.8 r270
JP1: Top Overlay "KF127-5.0-03P/180°" at 18.886,52.119 h0.7 r90
JP2: Top Overlay "KF127-5.0-2P" at 19.14,41.626 h0.7 r90
JP3: Top Overlay "KF127-5.0-2P" at 19.14,31.626 h0.7 r90
JP4: Top Overlay "KF127-5.0-2P" at 19.14,21.626 h0.7 r90
JP5: Top Overlay "KF127-5.0-03P/180°" at 18.886,3.167 h0.7 r90
K4: Top Overlay "ON" at 58.877,22.403 h1.02; Top Overlay "1" at 58.42,18.085 h1.02; Top Overlay "2" at 60.681,18.085 h1.02
RF: Top Overlay "1" at 93.215,32.989 h0.7 r90
RV1: Top Overlay "7D" at 27.813,62.814 h0.8
UP2: Top Overlay "IN" at 59.385,27.686 h0.51 r270; Top Overlay "5V" at 63.271,27.711 h0.51 r270